# Altium PCB MSOP8.PcbDoc
Units mil, origin at the board's own origin, x right, y up, seen from the top; angles counter-clockwise.
Board outline 379.21 x 437 mil, 2 copper layers (Top Layer, Bottom Layer); 2 components, 142 nets, 16 pads, 2 vias.
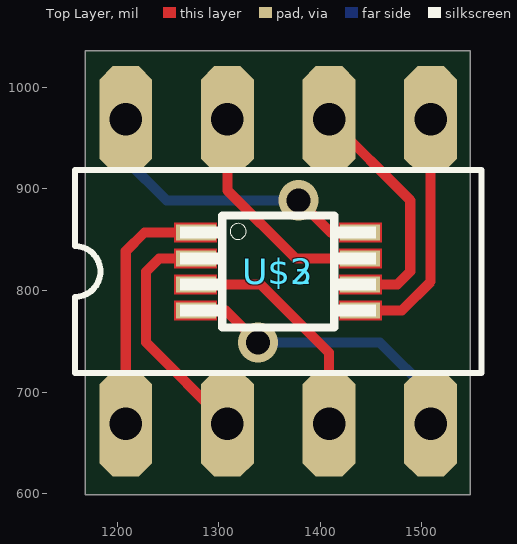
[diagram p0: Top Layer view]
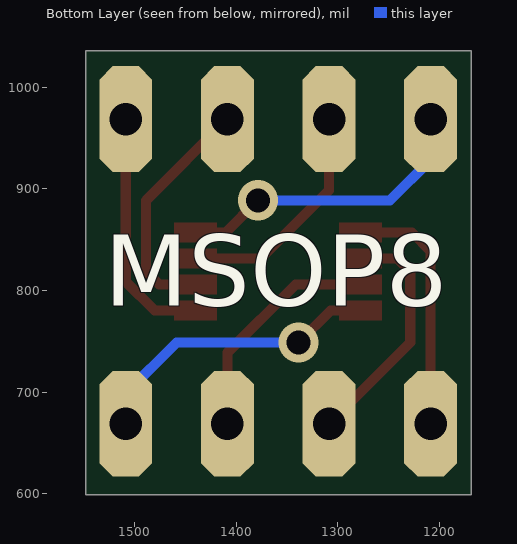
[diagram p1: Bottom Layer view, seen from below]

## Layer stack, top to bottom
Top Layer: signal copper 1.4
Dielectric: dielectric 12.6, FR-4, Dk 4.8
Bottom Layer: signal copper 1.4

## Board outline
1168.67,598.67 1547.88,598.67 1547.88,1035.67 1168.67,1035.67

## Design rules (kind name [scope] priority, off if disabled: settings)
Clearance [All] p1: gap=10
PolygonConnect [All] p1: connectstyle=Relief reliefconductorwidth=10 reliefentries=4 polygonreliefangle="90 Angle"
RoutingVias [All] p1: holewidth=28 width=50 viastyle="Through Hole" minholewidth=28 minwidth=50 maxholewidth=28 maxwidth=50
SilkscreenOverComponentPads [All] p1: minsilkscreentomaskgap=10
SolderMaskExpansion [All] p1: expansion=4
Width [All] p1: maxlimit=10 minlimit=10 preferedwidth=10
27 further rules are at their usual default settings.

## Components (designator, comment, footprint, x,y, rotation, side; value= is the part's Value field where it differs from the comment)
U$2 "MCP3202-MSOP" MSOP8 1358.67,818.67 r270 top
U$3 "MCP3202" DIL8 1358.67,818.67 r0 top

## Footprints (in the part's own frame and the unit in brackets; to place one, negate y for a bottom-side part, rotate by r counter-clockwise, add the part's x,y. Pads: shape width x height; smd on the part's side, far side on the other; paste and mask are expansions set on the pad)
DIL8 [mil]
  oct 52x104 hole 32: 1(-150,-150) 2(-50,-150) 3(50,-150) 4(150,-150) 5(150,150) 6(50,150) 7(-50,150) 8(-150,150)
  silkscreen extent -200,-100 200,100
MSOP8 [mm]
  rect 0.4x1 smd: 1(-0.975,-2.05) 2(-0.325,-2.05) 3(0.325,-2.05) 4(0.975,-2.05) 5(0.975,2.05) 6(0.325,2.05) 7(-0.325,2.05) 8(-0.975,2.05)
  Top Layer region: -1.225,-2.6 -0.725,-2.6 -0.725,-1.525 -1.225,-1.525
  Top Layer region: -0.575,-2.6 -0.075,-2.6 -0.075,-1.525 -0.575,-1.525
  Top Layer region: 0.075,-2.6 0.575,-2.6 0.575,-1.525 0.075,-1.525
  Top Layer region: 0.725,-2.6 1.225,-2.6 1.225,-1.525 0.725,-1.525
  Top Layer region: 1.225,2.6 0.725,2.6 0.725,1.525 1.225,1.525
  Top Layer region: 0.575,2.6 0.075,2.6 0.075,1.525 0.575,1.525
  Top Layer region: -0.075,2.6 -0.575,2.6 -0.575,1.525 -0.075,1.525
  Top Layer region: -0.725,2.6 -1.225,2.6 -1.225,1.525 -0.725,1.525
  silkscreen extent -1.4,-2.45 1.4,2.45

## Via types
v1: diameter 39.62, hole 23.62, Top Layer to Bottom Layer, 2 vias

## Nets (pads, with @x,y where several pads share a name; then routed paths per layer and width w, separated by ;. In a path a pad name is that pad's centre, name@x,y a point inside that pad or via, vN(x,y) a via of type N, cw(c..) or ccw(c..) an arc to the next point about the centre after c; other vN are vias at no path point)
N$1: 
N$2: 
N$3: 
N$4: 
N$5: 
N$6: 
N$7: 
N$8: 
N$9: 
N$10: 
N$11: 
N$12: 
N$13: 
N$14: 
N$15: 
N$16: 
N$17: 
N$18: 
N$19: 
N$20: 
N$21: 
N$22: 
N$23: 
N$24: 
N$25: 
N$26: 
N$27: 
N$28: 
N$29: U$2.2 U$3.2 | length 237.7
  Top Layer w10: U$2.2 1241.46,831.46 1228.67,818.67 1228.67,748.67 U$3.2
N$30: U$2.6 U$3.6 | length 237.7
  Top Layer w10: U$3.6 1488.67,888.67 1488.67,818.67 1475.87,805.87 U$2.6
N$31: U$2.8 U$3.8 | length 300.4
  Top Layer w10: v1(1378.67,888.67) 1410.28,857.05 U$2.8
  Bottom Layer w10: U$3.8 1208.67,928.67 1248.67,888.67 v1(1378.67,888.67)
N$32: U$2.7 U$3.7 | length 228.6
  Top Layer w10: U$3.7 1308.67,898.67 1375.87,831.46 U$2.7
N$33: U$2.4 U$3.4 | length 294.5
  Top Layer w10: U$2.4 1307.05,780.28 v1(1338.67,748.67)
  Bottom Layer w10: v1(1338.67,748.67) 1458.67,748.67 1508.67,698.67 U$3.4
N$34: U$2.3 U$3.3 | length 228.5
  Top Layer w10: U$2.3 1341.46,805.87 1408.67,738.67 U$3.3
N$35: U$2.5 U$3.5 | length 241
  Top Layer w10: U$2.5 1480.28,780.28 1508.67,808.67 U$3.5
N$36: U$2.1 U$3.1 | length 246.9
  Top Layer w10: U$3.1 1208.67,838.67 1227.05,857.05 U$2.1
N$37: 
N$38: 
N$39: 
N$40: 
N$41: 
N$42: 
N$43: 
N$44: 
S$1: 
S$2: 
S$3: 
S$4: 
S$5: 
S$6: 
S$7: 
S$8: 
S$9: 
S$10: 
S$11: 
S$12: 
S$13: 
S$14: 
S$15: 
S$16: 
S$17: 
S$18: 
S$19: 
S$20: 
S$21: 
S$22: 
S$23: 
S$24: 
S$25: 
S$26: 
S$27: 
S$28: 
S$29: 
S$30: 
S$31: 
S$32: 
S$33: 
S$34: 
S$35: 
S$36: 
S$37: 
S$38: 
S$39: 
S$40: 
S$41: 
S$42: 
S$43: 
S$44: 
S$45: 
S$46: 
S$47: 
S$48: 
S$49: 
S$50: 
S$51: 
S$52: 
S$53: 
S$54: 
S$55: 
S$56: 
S$57: 
S$58: 
S$59: 
S$60: 
S$61: 
S$62: 
S$63: 
S$64: 
S$65: 
S$66: 
S$67: 
S$68: 
S$69: 
S$70: 
S$71: 
S$72: 
S$73: 
S$74: 
S$75: 
S$76: 
S$77: 
S$78: 
S$79: 
S$80: 
S$81: 
S$82: 
S$83: 
S$84: 
S$85: 
S$86: 
S$87: 
S$88: 
S$89: 
S$90: 
S$91: 
S$92: 
S$93: 
S$94: 
S$95: 
S$96: 
S$97: 
S$98: 

## Silkscreen, mask and mechanical layers (free items; w line width, h text height)
Bottom Overlay:
  text "MSOP8" at 1530,785 h70